# Altium PCB mainboardDory.PcbDoc (part 2 of 2)
Units mil, origin at the board's own origin, x right, y up, seen from the top; angles counter-clockwise.
Board outline 5000 x 2698.04 mil, 2 copper layers (Top Layer, Bottom Layer); 85 components, 78 nets, 393 pads, 169 vias.
Unrouted connection lines stored in the file: 5.
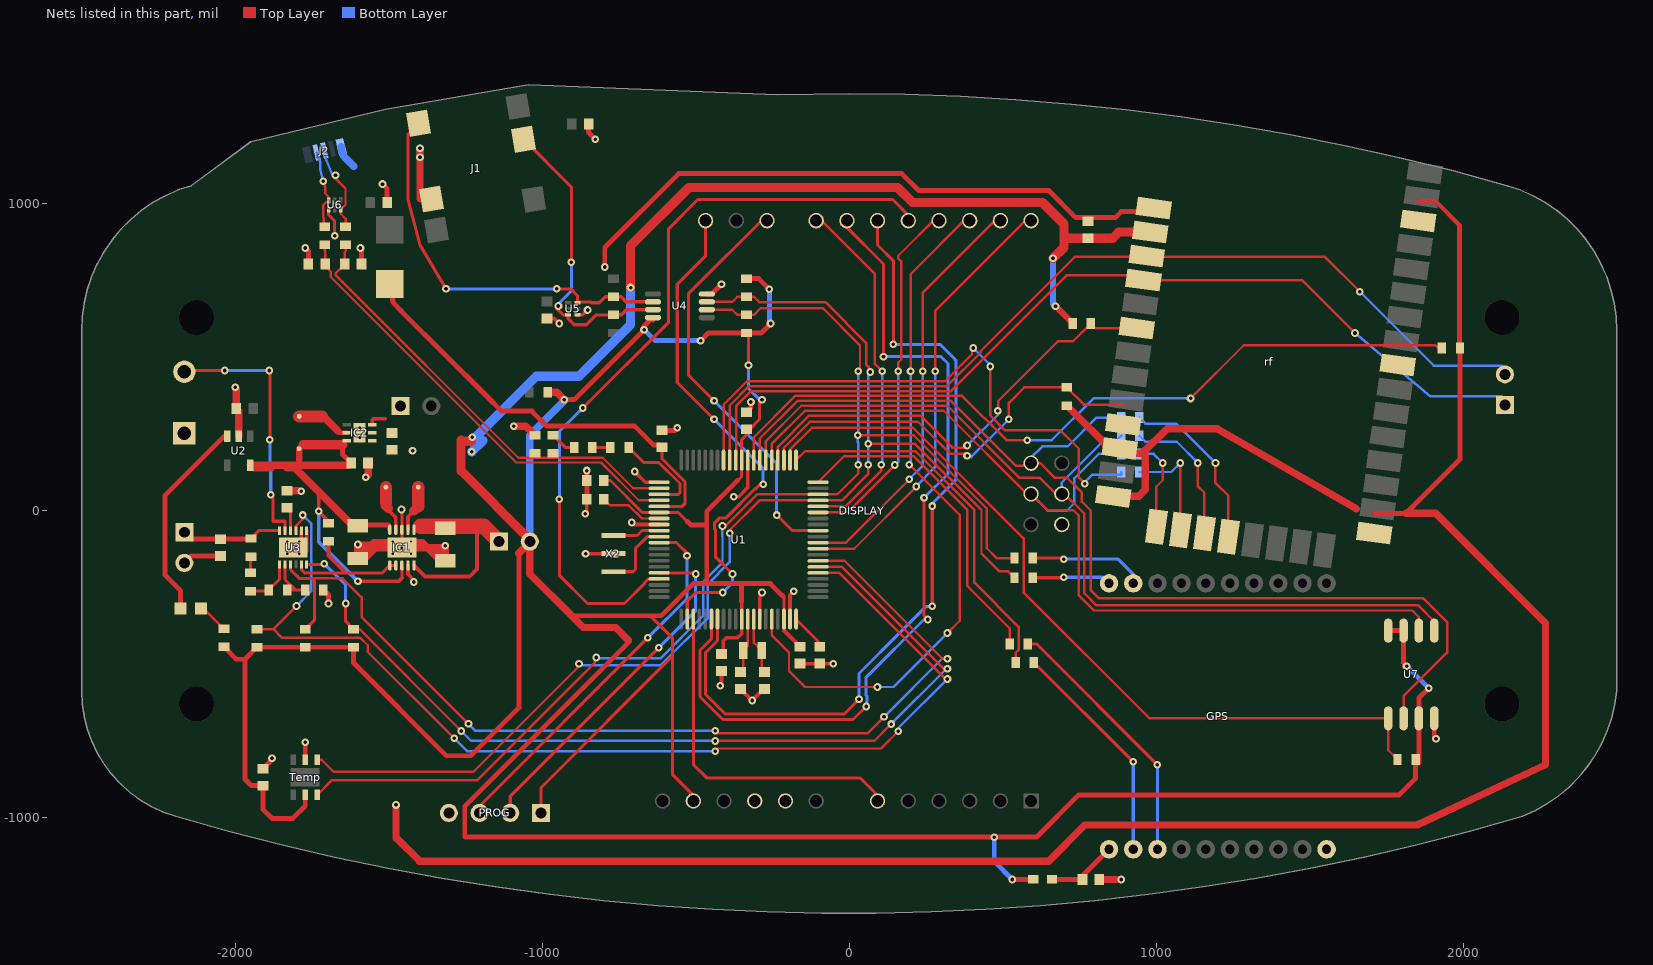
[diagram p2: the nets of this part, all layers, seen from the top]

## Via types
v1: diameter 25, hole 11.81, Top Layer to Bottom Layer, 150 vias
v2: diameter 19.68, hole 7.87, Top Layer to Bottom Layer, 15 vias
v3: diameter 35.43, hole 23.62, Top Layer to Bottom Layer, 3 vias
v4: diameter 27.56, hole 11.81, Top Layer to Bottom Layer, 1 vias

## Nets (pads, with @x,y where several pads share a name; then routed paths per layer and width w, separated by ;. In a path a pad name is that pad's centre, name@x,y a point inside that pad or via, vN(x,y) a via of type N, cw(c..) or ccw(c..) an arc to the next point about the centre after c; other vN are vias at no path point) (continued)
GND: BT1.2 C1.1 C2.1 C3.1 C4.1 C5.1 C6.1 C7.1 C8.1 C9.1 C10.1 C11.1 C12.1 C13.1 C14.1 C15.2 C16.2 C17.1 C18.1 C19.2 C20.1 C21.1 C22.1 C23.1 C24.2 DISPLAY.GND0 DISPLAY.GND1 DISPLAY.GND2 GPS.10 IC1.3 IC1.9 IC1.11 IC2.1 IC2.7 J1.2 J2.5 PROG.4 R6.1 R20.2 R26.1 R27.1 rf.1 rf.11 rf.13 rf.22 rf.35 S1.1 Temp.2 U1.14 U1.19 U1.49 U1.61 U1.68 U2.2 U3.1 U3.2 U3.13 U4.4 U5.4 U6.4 U7.4 X2.2 | length 13589.7
  Top Layer w10: U6.4@-1695.57,980.95 -1695.89,964.11 -1675.89,944.11 -1675.89,900.11 v1@-1671.89,896.11 ; v2(-1456.69,-119.8) -1456.69,-104.42 IC1.3@-1456.69,-61.72 -1456.69,-4.69 v1@-1456,-4
  Top Layer w12: U3.13@-1811.02,-119.8 v2(-1791.34,-100.11) U3.13@-1784.45,-93.22 ; U3.2@-1784.45,-64.68 U3.13@-1784.45,-93.22 ; U3.1@-1766.73,-64.68 -1766.73,-131.27 -1784.45,-113.55 U3.13@-1784.45,-93.22 ; v2(-1456.69,-119.8) IC1.11@-1437.01,-139.48 ; IC1.9@-1437.01,-177.87 -1437.01,-206.99 -1418,-226 v1(-1418,-232) ; C7.1@-984,626.44 -960.44,626.44 v1(-944,610) ; U5.4@-884.84,638.31 -867.69,638.31 v1(-852,654) ; v1(-860,-10) -854.33,-4.33 C15.2@-854.33,37.68 ; v1(-858.52,-139.48) X2.2@-767.72,-139.48 ; v1(-708,-38) -701.21,-44.79 U1.68@-618.86,-44.79 ; v1(-698.82,127.95) -663.87,93.01 U1.61@-618.86,93.01 ; v1(-420,-570) -416,-566 C21.1@-416,-521.56 ; v1(-376,46) -360,46 -330.47,75.53 U1.49@-330.47,164.86 ; C12.1@-354.33,-580.43 v1@-316.76,-618 ; v1(-316,-618) v1@-316.76,-618 ; U1.14@-291.1,-352.86 -291.1,-273.1 v1(-284,-266) ; C14.1@-275.59,-580.43 -279.18,-580.43 v1@-316.76,-618 ; U1.19@-192.68,-352.86 -192.68,-274.68 v1(-180,-262) ; C20.1@-160,-497.56 -159.56,-498 v1(-52,-498)
  Top Layer w14: 1853.26,1008.72 1909.28,1008.72 1988,930 ; U7.4@1905.71,-675.9 1905.71,-736.24 v1(1911.46,-742)
  Top Layer w16: BT1.2@-2165.35,-169.8 -2142.91,-147.35 C3.1@-2047.24,-147.35 ; C4.1@-1996.06,332.96 C4.1@-1988.19,325.09 ; C11.1@-1909.45,-840.27 -1880,-810.82 v1(-1880,-806) ; v1(-1772,-754) -1771.65,-754.35 Temp.2@-1771.65,-810.74 ; v1(-1771.89,856.11) -1761.43,845.65 C8.1@-1761.43,803.2 ; R6.1@-1712.6,-257.59 -1696,-274.19 v1(-1696,-302) ; v1(-1591.89,856.11) -1588.2,852.43 C9.1@-1588.2,803.2 ; v1(-1519.89,1064.11) -1505.02,1049.24 C10.1@-1505.02,1004.36 ; v1(-855,131) -854.33,130.33 C19.2@-854.33,98.43 C15.2@-854.33,37.68 ; C6.1@-848.43,1259.84 -848.43,1232.28 v1(-826.77,1210.63) ; v1(-796,794) -796,857.54 -555.54,1098 171.69,1098 226.38,1043.31 649.61,1043.31 738.19,954.72 866.14,954.72 885.83,974.41 935.04,974.41 rf.1@964.57,1003.94 ; C18.1@-610.24,262.09 -567.91,262.09 v1(-560,270) ; U4.4@-463.58,705.99 -448.01,705.99 v1(-416,738) ; C22.1@-334.65,321.15 -320.5,335.3 -320.5,354 v1(-320,354.5) ; 1710.33,-8.29 1813.71,-8.29 1989.53,167.53 R27.1@1989.53,530 1988,531.53 1988,930
  Top Layer w24: v1(-2000,402) -1996.06,398.06 C4.1@-1996.06,332.96 ; U2.2@-1988.19,242.41 C4.1@-1988.19,325.09 ; C5.1@-1830.71,65.24 v1@-1793.47,65.24 ; IC2.7@-1594.49,240.49 IC2.7@-1594.49,254.22 ; v1(-1575,109) -1566.93,117.07 C2.1@-1566.93,155.8 ; -1476,-1066 v1(-1476,-958) ; -1473.37,-1066 -1397.64,-1141.73 ; -1400.27,-1141.73 649.61,-1141.73 767.72,-1023.62 1850.39,-1023.62 2268,-826.77 2268,-366 1910.28,-8.29 1813.71,-8.29 ; v1(-1397.64,1181.1) v1(-1397.64,1151.57) -1397.64,1015.33 J1.2@-1360.72,1015.33 ; C23.1@-1312,-153.26 C23.1@-1316,-153.26 ; v1(-1092.52,275.59) -1053.15,275.59 R20.2@-1023.62,246.06 ; R26.1@708.66,342.8 864.46,187.01 954.72,187.01 ; C17.1@814.96,-1200.79 v1(885.83,-1200.79) ; rf.13@859.69,47 942.67,47 964.57,68.9 964.57,177.17 954.72,187.01 ; 1652,6 1198.27,267.73 1035.44,267.73 954.72,187.01 ; C24.2@-1600,-155.15 -1577.15,-155.15 -1541.8,-119.8 v2(-1456.69,-119.8) -1374.2,-119.8 ; C24.2@-1600,-155.15 v1(-1600,-110) v1@-1597.43,-112.57 ; C24.2@-1600,-155.15 -1575.43,-130.57 ; v1@-1597.43,-112.57 -1557.43,-112.57 ; v1@-1597.43,-112.57 -1579.43,-130.57 -1575.43,-130.57 ; -1575.43,-130.57 -1557.43,-112.57 ; -1557.43,-112.57 -1549.27,-104.42 -1456.69,-104.42 -1389.58,-104.42 -1374.2,-119.8 ; -1374.2,-119.8 -1340,-119.8 ; -1374.2,-119.8 -1340.74,-153.26 C23.1@-1325.89,-153.26 ; -1340,-119.8 -1340,-139.15 C23.1@-1325.89,-153.26 ; -1340,-119.8 -1321.8,-119.8 v1(-1316,-114) C23.1@-1316,-153.26 ; C23.1@-1325.89,-153.26 C23.1@-1316,-163.15 C23.1@-1316,-153.26 ; C23.1@-1325.89,-153.26 C23.1@-1316,-153.26
  Bottom Layer w12: v1@-380,50 v1(-376,46) ; v1@-316,-622 v1(-316,-618)
  Bottom Layer w24: J2.5@-1654.82,1186.15 ccw(c-1598.2,1186.15) -1638.24,1146.11 -1614.17,1122.05 ; v1(-1397.64,1151.57) v1(-1397.64,1181.1)
  other v1: -1458,4 -1785,64 -1422,196 -1675.89,896.11
  other v2: -1830.71,-139.48 -1791.34,-139.48 -1486.22,-139.48 -1427.17,-139.48 -1830.71,-100.11 -1486.22,-100.11 -1427.17,-100.11 -1594.49,238.47 -1594.49,269.97
LED0: DISPLAY.D0 U1.29 | length 1442.7
  Top Layer w8: U1.29@-101.14,-123.53 16.36,-123.53 v1(218.94,79.06) ; v1(280,454) 280,650.5 DISPLAY.D0@592.5,963
  Bottom Layer w8: v1(218.94,79.06) 218.94,81.18 280,142.24 v1(280,454)
LED1: DISPLAY.D1 U1.30 | length 1365.8
  Top Layer w8: U1.30@-101.14,-103.84 -10.63,-103.84 v1(195.61,102.39) ; v1(240,454) 240,710.5 DISPLAY.D1@492.5,963
  Bottom Layer w8: v1(195.61,102.39) 195.61,103.1 240,147.49 v1(240,454)
NetC1_2: C1.2 IC2.2 IC2.3 JP5V.1 | length 59.5
  Top Layer w12: IC2.3@-1553.15,279.81 -1553.15,296.85 -1550,300 -1512,300
NetC5_2: C5.2 U3.4 | length 79.3
  Top Layer w10: C5.2@-1830.71,10.13 -1819.88,-0.7 U3.4@-1819.88,-64.68
NetC12_2: C12.2 U1.12 X1.2 | length 182.3
  Top Layer w8: C12.2@-354.33,-525.31 -344.49,-515.46 X1.2@-344.49,-454.44 -330.47,-440.43 U1.12@-330.47,-352.86
NetC14_2: C14.2 U1.13 X1.1 | length 187
  Top Layer w8: U1.13@-310.79,-352.86 -310.79,-429.09 X1.1@-285.43,-454.44 -285.43,-515.46 C14.2@-275.59,-525.31
NetC15_1: C15.1 U1.67 | length 206.4
  Top Layer w8: C15.1@-799.21,37.68 -779.53,18 -718.35,18 -675.24,-25.1 U1.67@-618.86,-25.1
NetC16_1: C16.1 U1.20 | length 105.1
  Top Layer w10: U1.20@-172.99,-352.86 C16.1@-98.7,-427.15
NetC17_2: C17.2 GPS.1 L3.2 | length 233.7
  Top Layer w16: L3.2@660.43,-1200.79 C17.2@759.84,-1200.79 759.84,-1188.98 GPS.1@846.46,-1102.36
NetC23_2: C23.2 IC1.1 IC1.10 JP3V3.1 | length 646.8
  Top Layer w12: IC1.10@-1417.32,-177.87 -1381.19,-214 -1236,-214 -1212,-190 -1212,-50
  Top Layer w50: -1396,-50 -1212,-50 -1190.27,-50 JP3V3.1@-1140.16,-100.11
NetDS1_1: DS1.1 R3.2 | length 102.1
  Top Layer w8: DS1.1@-2110.54,-318 -2102.47,-318 R3.2@-2036,-384.47
NetDS1_2: DS1.2 U2.3 | length 671
  Top Layer w16: DS1.2@-2177.47,-318 -2177.47,-260.53 -2228,-210 -2228,50 -2035.59,242.41 U2.3@-2025.59,242.41
NetGPS_2: GPS.2 R12.1 | length 743.4
  Top Layer w10: R12.1@601.53,-494 v1(925.2,-817.67) ; GPS.2@925.2,-1103.31 GPS.2@925.2,-1102.36
  Bottom Layer w10: GPS.2@925.2,-1102.36 v1(925.2,-817.67)
NetGPS_3: GPS.3 R13.1 | length 865.5
  Top Layer w10: R13.1@581.53,-434 611.17,-434 v1(1003.94,-826.77) ; GPS.3@1003.94,-1107.2 GPS.3@1003.94,-1102.36
  Bottom Layer w10: GPS.3@1003.94,-1102.36 v1(1003.94,-826.77)
NetGPS_19: GPS.19 R14.2 | length 379
  Top Layer w10: R14.2@597.53,-154 695.34,-154 v1(698.82,-157.48)
  Bottom Layer w10: v1(698.82,-157.48) 875.98,-157.48 925.2,-206.69 GPS.19@925.2,-236.22
NetGPS_20: GPS.20 R11.2 | length 257.7
  Top Layer w10: R11.2@597.53,-218 697.35,-218 v1(698.82,-216.54)
  Bottom Layer w10: v1(698.82,-216.54) 826.77,-216.54 GPS.20@846.46,-236.22
NetIC1_2: IC1.2 L1.2 | length 152.6
  Top Layer w12: IC1.2@-1437.01,-61.72 -1437.01,-19.66 -1418,-0.65
  Top Layer w30: -1418,-0.65 -1403.69,13.66
  Top Layer w40: -1403.69,13.66 L1.2@-1403.69,77.05
NetIC1_4: IC1.4 L1.1 | length 152.7
  Top Layer w12: -1498,15 -1498,-0.69 -1476.38,-22.32 IC1.4@-1476.38,-61.72 IC1.4@-1476,-61.35
  Top Layer w30: -1511.69,17.69 -1501,7
  Top Layer w40: -1508.69,25.69 L1.1@-1508.69,77.05
NetIC2_5: IC2.5 L2.2 | length 177.5
  Top Layer w16: -1664.22,254.22 IC2.5@-1635.83,254.22
  Top Layer w24: -1720,315 -1667,262
  Top Layer w40: L2.2@-1791.34,307.22 -1717.22,307.22
NetPROG_2: PROG.2 U1.76 | length 1148.8
  Top Layer w10: PROG.2@-1103.94,-984.25 -1103.94,-929.94 v1(-620,-446) ; U1.76@-618.86,-202.27 -503.73,-202.27 v1(-500,-206)
  Bottom Layer w10: v1(-620,-446) -500,-326 v1(-500,-206)
NetPROG_3: PROG.3 U1.71 | length 1212.2
  Top Layer w10: PROG.3@-1203.94,-961.94 v1(-656,-414) ; U1.71@-618.86,-103.84 -562.16,-103.84 -524,-142 v1(-528,-146)
  Bottom Layer w10: v1(-656,-414) -528,-286 v1(-528,-146)
NetR2_1: R2.1 R4.2 | length 53.6
  Top Layer w10: R4.2@-1950,-202.47 -1950,-150.5 R2.1@-1948.82,-149.32
NetR4_1: R4.1 R5.2 U3.7 | length 158.8
  Top Layer w10: R4.1@-1950,-261.53 -1893.7,-261.53 R5.2@-1889.76,-257.59 -1855.32,-223.14 U3.7@-1855.32,-174.91
NetR5_1: R5.1 R6.2 U3.8 | length 155.5
  Top Layer w10: U3.8@-1837.6,-174.91 -1837.6,-224.4 -1804.41,-257.59 ; R5.1@-1830.71,-257.59 -1804.41,-257.59 ; R6.2@-1771.65,-257.59 -1804.41,-257.59
NetR21_2: R21.2 rf.14 | length 263.1
  Top Layer w8: rf.14@1000.34,-9.84 1000.34,78.33 1021.36,99.34 v1(1021.36,155.8)
  Bottom Layer w8: R21.2@944.88,185.32 991.83,185.32 v1(1021.36,155.8)
NetR22_2: R22.2 rf.15 | length 364.2
  Top Layer w8: rf.15@1078.57,-62.52 v1(1078.57,155.8)
  Bottom Layer w8: R22.2@944.88,126.27 1049.05,126.27 v1(1078.57,155.8)
NetR23_2: R23.2 rf.16 | length 480.7
  Top Layer w8: v1(1135.79,155.8) 1135.79,79.66 1156.8,58.64 rf.16@1156.8,-88.58
  Bottom Layer w8: R23.2@944.88,244.38 964.55,224.71 1066.87,224.71 v1(1135.79,155.8)
NetR24_2: R24.2 rf.17 | length 531.7
  Top Layer w8: v1(1193,155.8) 1193,90.84 1235.03,48.8 rf.17@1235.03,-49.21
  Bottom Layer w8: R24.2@944.88,303.43 964.55,283.77 1065.03,283.77 v1(1193,155.8)
NetR110_1: R110.1 U1.63 | length 315.7
  Top Layer w10: R110.1@-718.5,206.69 -669.29,157.48 -620.08,157.48 -551.18,88.58 -551.18,59.06 -556.6,53.64 U1.63@-618.86,53.64
NetR110_2: R110.2 R111.1 | length 59.1
  Top Layer w10: R111.1@-836.61,206.69 R110.2@-777.56,206.69
NetR111_2: R111.2 R112.1 | length 85.2
  Top Layer w10: R112.1@-964.57,246.06 -925.2,206.69 R111.2@-895.67,206.69
POWER_ENABLE: IC1.6 IC1.7 R15.1 U3.11 | length 463
  Top Layer w10: U3.11@-1784.45,-174.91 -1784.45,-191.45 -1773.9,-202 -1644,-202 -1520.2,-202 IC1.6@-1496.06,-177.87 IC1.7@-1476.38,-177.87
  Top Layer w12: R15.1@-1696,-99.53 -1696,-146 -1644,-198 -1644,-202
POWER_INTERRUPT: R28.1 U1.26 U3.12 | length 3052.2
  Top Layer w8: R28.1@-1614.17,-385.54 -1595.13,-385.54 v1(-1263.33,-717.33) ; v1(-436,-749.69) 81.65,-749.69 v1(136.67,-694.67) ; U1.26@-101.14,-182.58 -23.58,-182.58 308.84,-515 v1(320,-515)
  Top Layer w10: U3.12@-1766.73,-174.91 -1712.91,-174.91 v1(-1710,-172) ; v1(-1640,-302) -1640,-359.72 R28.1@-1614.17,-385.54
  Bottom Layer w8: v1(-1263.33,-717.33) -1230.98,-749.69 v1(-436,-749.69) ; v1(136.67,-694.67) 316.33,-515 v1(320,-515)
  Bottom Layer w10: v1(-1710,-172) -1640,-242 v1(-1640,-302)
POWER_KILL: R29.1 U1.25 U3.3 | length 3587.7
  Top Layer w8: R29.1@-1929.13,-385.54 -1875.54,-385.54 ; U3.3@-1802.17,-64.68 -1802.17,-49.55 -1780,-27.39 v1(-1780,-14) ; v1(-1800,-310) -1875.54,-385.54 ; v1(-1286.67,-740.67) -1568,-459.34 -1568,-438 -1592,-414 -1847.09,-414 -1875.54,-385.54 ; v1(-436,-782.69) -427.5,-774.19 103.81,-774.19 108.63,-769.37 v1(160,-718) ; U1.25@-101.14,-202.27 -31.73,-202.27 314,-548 v1(320,-548)
  Bottom Layer w8: v1(-1800,-310) -1752,-262 -1752,-42 v1(-1780,-14) ; v1(-1286.67,-740.67) -1244.65,-782.69 v1(-436,-782.69) ; v1(160,-718) 160,-708 v1(320,-548)
POWER_WARNING: R19.1 U1.27 U3.9 | length 3247.6
  Top Layer w8: -1760,-220 -1750.19,-220 -1651.46,-220 -1650,-220 -1588,-282 -1588,-346 v1(-1240,-694) ; v1(-436,-716.69) -427.5,-725.19 59.48,-725.19 v1(113.33,-671.33) ; U1.27@-101.14,-162.9 -15.42,-162.9 303.68,-482 v1(320,-482)
  Top Layer w10: -1819.88,-191.45 U3.9@-1819.88,-174.91 ; -1818.09,-193.25 -1791.34,-220 -1760,-220 ; R19.1@-1771.65,-385.54 -1742.13,-356.02 -1742.13,-228.06 -1750.19,-220
  Bottom Layer w8: v1(-1240,-694) -1217.32,-716.69 v1(-436,-716.69) ; v1(113.33,-671.33) 302.66,-482 v1(320,-482)
POWERBTN: S1.2 U3.5 | length 844.2
  Top Layer w10: S1.2@-2165.35,452.65 -2161,457 v1(-2034,457) ; v1(-1889,457) -1887,455 v1(-1887,231) ; v1(-1884,52.03) -1876.97,45 -1876.97,-34.17 -1837.6,-34.17 U3.5@-1837.6,-64.68
  Bottom Layer w10: v1(-2034,457) v1(-1889,457) ; v1(-1887,231) -1887,133 -1884,130 v1(-1884,52.03)
RX_FROM_GPS: R12.2 U1.41 | length 1231.4
  Top Layer w8: U1.41@-172.99,164.86 -143.85,194 79.85,194 100.15,194 ; 101.15,194 216.4,194 408,2.4 408,-234 552,-378 552,-452.94 542.47,-462.47 R12.2@542.47,-494
RX_FROM_ZIGBEE: rf.3 RX/TX.2 U1.52 | length 3043.1
  Top Layer w8: U1.52@-389.53,164.86 -389.53,342.25 -325.78,406 318.63,406 428.5,515.87 428.5,520.44 734.83,826.77 1549.86,826.77 v1(1663.32,713.32)
  Bottom Layer w8: v1(1663.32,713.32) 1904.3,472.33 2125.98,472.33
SCL: R7.1 R14.1 Temp.6 U1.38 U4.2 | length 4045.6
  Top Layer w8: Temp.6@-1732.28,-924.91 -1685.65,-878.28 -1212.28,-878.28 -828,-494 v1@-828,-489.7 ; U4.2@-463.58,654.81 -380.92,654.81 -364.19,638.08 R7.1@-334.65,638.08 -310.27,638.08 -288.74,659.61 -85.61,659.61 35.23,538.77 v1@35.23,458.77 ; v1(-412.63,-49.37) -403.21,-49.37 -300.2,53.64 U1.38@-101.14,53.64 -38.86,53.64 29.5,122 v1(29.5,150) ; v1(28,246) 209.66,246 448,7.66 448,-122 480,-154 R14.1@538.47,-154
  Bottom Layer w8: v1@-815,-481 -615,-481 -476,-342 -476,-231.37 -412.63,-168 -412.63,-84.02 -413.79,-82.86 -413.79,-50.54 v1(-412.63,-49.37) ; v1@27.23,245.23 27.23,224.27 29.5,222 v1(29.5,150) ; v1@29.5,246 v1(29.5,454)
  other v1: -824,-478
SCL5V: J1.3 R8.1 U4.7 U5.3 | length 1010
  Top Layer w10: J1.3@-1060.35,1210.11 -905,1054.76 v1(-905,810) v1@-912,817 ; v1(-947,667) -954,660 -932.32,638.31 U5.3@-915.16,638.31 -915.16,625.37 -895.79,606 -856,606 -823.92,638.08 R8.1@-767.72,638.08
  Top Layer w12: R8.1@-767.72,638.08 -742.27,638.08 -725.54,654.81 U4.7@-638.78,654.81
  Bottom Layer w10: v1(-947,667) -947,674 -905,716 v1(-905,810)
SCREEN_BORDER: DISPLAY.D3 U1.35 | length 1196.6
  Top Layer w8: U1.35@-101.14,-5.42 -5.54,-5.42 v1(148.94,149.06) ; v1(160,454) 160,482.35 169.5,491.85 169.5,812.54 160,822.04 160,830.5 DISPLAY.D3@292.5,963
  Bottom Layer w8: v1(148.94,149.06) 151.06,149.06 160,158 v1(160,454)
SCREEN_BUSY: DISPLAY.D7 U1.36 | length 1177
  Top Layer w8: DISPLAY.D7@-107.5,963 84,771.5 84,478 v1(108,454) ; U1.36@-101.14,14.27 -11.73,14.27 104,130 v1(104,150)
  Bottom Layer w8: v1(104,150) 108,154 v1(108,454)
SCREEN_DISCHARGE: DISPLAY.D8 U1.32 | length 1358.3
  Top Layer w10: v1(-440,358) -524,442 -524,706.5 DISPLAY.D8@-267.5,963 ; v1(-236,-14) -185.53,-64.47 U1.32@-101.14,-64.47
  Bottom Layer w10: v1(-440,358) -236,154 v1(-236,-14)
SCREEN_PANEL_ON: DISPLAY.D2 U1.16 | length 2325.2
  Top Layer w8: U1.16@-251.73,-352.86 -251.73,-406.27 -196,-462 -196,-522 -144,-574 v1(92,-574) ; v1(196,150) 360,-14 360,-358 v1(320,-398) ; v1(200,454) 200,770.5 DISPLAY.D2@392.5,963
  Bottom Layer w8: v1(92,-574) 144,-574 v1(320,-398) ; v1@200,152.75 v1(200,454)
SCREEN_PWM: DISPLAY.D5 U1.7 | length 2721.9
  Top Layer w10: U1.7@-428.9,-352.86 -428.9,-422.9 -468,-462 -468,-598 -404,-662 -16,-662 v1(32,-614) ; DISPLAY.D5@92.5,963 92.5,865.5 145,813 145,541 v1(144,542) ; v1(270.63,-311.37) v1(270.63,15.37)
  Bottom Layer w10: v1(32,-614) 32,-530 167.87,-394.13 167.87,-394.07 209.94,-352 ; v1(144,542) 296,542 340,498 347.61,490.38 347.61,100.85 340,93.23 270.63,23.86 v1(270.63,15.37) ; 212,-350 250.63,-311.37 v1(270.63,-311.37)
SCREEN_RST_LOW: DISPLAY.D6 U1.6 | length 2833.4
  Top Layer w10: U1.6@-448.58,-352.86 -448.58,-417.13 -486,-454.54 -486,-605.46 -411.46,-680 12.67,-680 v1(55.33,-637.33) ; DISPLAY.D6@-7.5,963 -7.5,923.07 112,803.57 v1(112,502) ; v1(244,42) 244,-342 v1(256,-354)
  Bottom Layer w10: v1(55.33,-637.33) 57.5,-635.17 57.5,-603.44 55.33,-601.27 55.33,-542.67 244,-354 v1(256,-354) ; v1(112,502) 299.23,502 321.61,479.62 321.61,119.62 v1(244,42)
SCREEN_TEMP: DISPLAY.A0 U1.3 | length 1115.3
  Top Layer w10: U1.3@-507.64,-352.86 -507.64,-826.36 -464,-870 35.5,-870 DISPLAY.A0@92.5,-927
SDA: R9.1 R11.1 Temp.1 U1.37 U4.3 | length 4088.6
  Top Layer w8: Temp.1@-1732.28,-810.74 -1718.27,-810.74 -1679.01,-850 -1224,-850 v1@-882,-508 ; U4.3@-463.58,680.4 -380.92,680.4 -364.19,697.13 R9.1@-334.65,697.13 -310.27,697.13 -292.74,679.61 -77.32,679.61 55.23,547.05 55.23,476.77 63.23,468.77 v1@63.23,458.77 ; v1(-389.29,-72.71) -389.29,-63.29 -292.05,33.95 U1.37@-101.14,33.95 -23.9,33.95 61.73,119.58 v1@61.73,149.23 ; v1(62.5,218) 215.03,218 431.03,2 431.03,-138.97 489.32,-197.26 517.73,-197.26 R11.1@538.47,-218
  Bottom Layer w8: v1(-880,-498) -875.5,-502.5 -613.87,-502.5 -460,-348.63 -460,-238 -389.29,-167.29 v1(-389.29,-72.71) ; v1@61.73,453.23 61.73,217.23 v1(62.5,218) v1(62.5,150)
  other v1: 69,452
SDA5V: J1.4 R10.1 U4.6 U5.6 | length 1304.4
  Top Layer w10: J1.4@-1402.58,1261.8 -1437.01,1227.37 -1437.01,1013.78 -1397.64,866.14 v1(-1313,723) ; v1(-952,723) -907,723 -884.84,700.84 U5.6@-884.84,677.68 -883.03,679.5 -841.44,679.5 -839.62,677.68 -813.72,677.68 -794.27,697.13 R10.1@-767.72,697.13
  Top Layer w12: R10.1@-767.72,697.13 -742.27,697.13 -725.54,680.4 U4.6@-638.78,680.4
  Bottom Layer w10: v1(-1313,723) v1(-952,723)
SPI_EPD_CS: DISPLAY.D10 U1.2 | length 1686.4
  Top Layer w10: U1.2@-527.32,-352.86 -527.32,-293.32 -500,-266 v1(-412,-266) ; DISPLAY.D10@-467.5,963 -467.5,830.5 -560,738 -560,418 v1(-440,298) ; v1(-380,-206) -436,-150 -436,-62.06 -438.13,-59.94 -438.13,-38.81 -423.19,-23.87 -402.06,-23.87 -401.97,-23.97 -304,74 -304,71.64 v1@-286.27,89.37
  Bottom Layer w10: v1(-440,298) -280,138 v1@-280,90 ; v1(-412,-266) -380,-234 v1(-380,-206)
  other v1: -280,86
SPI_FLASH_CS: R25.1 U1.42 U7.1 | length 2654.1
  Top Layer w8: U1.42@-192.68,164.86 -190.9,166.64 -190.9,200.82 -121.22,270.5 207.78,270.5 568,-89.72 568,-266 977.9,-675.9 U7.1@1755.71,-675.9 1755.71,-779.77 R25.1@1785.94,-810
SPI_MISO: DISPLAY.MISO R24.1 U1.47 U7.2 | length 3561.4
  Top Layer w8: U1.47@-291.1,164.86 -291.1,234.9 -168,358 331.68,358 543.68,146 565.5,146 DISPLAY.MISO@592.5,173 ; DISPLAY.MISO@592.5,155 622.56,155 669.29,108.27 708.66,108.27 757.87,59.06 757.87,29.53 787.4,0 787.4,-259.28 813.55,-285.43 1870.08,-285.43 1947.46,-362.82 1947.46,-462 1805.71,-603.76 U7.2@1805.71,-675.9
  Bottom Layer w8: DISPLAY.MISO@592.5,173 629.5,210 711.97,210 805.4,303.43 R24.1@885.83,303.43
SPI_MOSI: DISPLAY.MOSI R23.1 U1.46 U7.5 | length 3053.1
  Top Layer w8: U1.46@-271.42,164.86 -271.42,226.74 -156.16,342 319.84,342 553.57,108.27 620.08,108.27 673.35,55 DISPLAY.MOSI@692.5,55 701.5,55 765.55,-9.05 765.55,-268.33 804.5,-307.29 1852.56,-307.29 1905.71,-360.43 U7.5@1905.71,-390.46
  Bottom Layer w8: DISPLAY.MOSI@692.5,55 692.5,92.11 825.07,224.67 866.12,224.67 R23.1@885.83,244.38
SPI_SCK: DISPLAY.SCK R21.1 U1.45 U7.6 | length 3116.4
  Top Layer w8: U1.45@-251.73,164.86 -251.73,218.59 -144.32,326 308,326 DISPLAY.SCK@585.75,48.25 ; DISPLAY.SCK@592.5,55 645.81,1.69 730.04,1.69 748.03,-16.31 748.03,-275.59 797.24,-324.8 1833.88,-324.8 1855.71,-346.63 U7.6@1855.71,-390.46
  Bottom Layer w8: DISPLAY.SCK@592.5,55 647.5,0 708.66,0 733.27,24.61 733.27,105.64 812.95,185.32 R21.1@885.83,185.32
SPI_SD_CS: DISPLAY.D4 U1.77 | length 2515.6
  Top Layer w10: v1(-944,38) -944,-210 -852,-302 -732,-302 -666.31,-236.31 -666.31,-233.81 -655.23,-222.73 -619.64,-222.73 U1.77@-618.86,-221.95 ; v1(-867.35,334.65) -588,614 -588,918.56 -492.78,1013.78 141.72,1013.78 DISPLAY.D4@192.5,963
  Bottom Layer w10: v1(-944,38) -944,258 -877.2,324.8 -875.98,324.8 -867.35,333.43 v1(-867.35,334.65)
SPI_XBEE_CS: R22.1 U1.53 | length 1910.4
  Top Layer w8: U1.53@-409.21,164.86 -409.21,345.19 -332.4,422 312,422 400,510 400,526 v1(404,530) ; v1(460,470) 459.5,469.5 459.5,310.5 508,262 688,262 748.03,201.97 748.03,108.27 v1(767.72,88.58)
  Bottom Layer w8: v1(404,530) 460,474 v1(460,470) ; v1@770.18,95.96 792.32,118.11 885.83,118.11 R22.1@885.83,126.27
TX_TO_GPS: R13.2 U1.40 | length 1086.6
  Top Layer w8: U1.40@-101.14,93.01 -16.15,178 73.22,178 106.78,178 ; 107.78,178 209.77,178 384,3.77 384,-243.94 391.03,-250.97 522.47,-382.41 R13.2@522.47,-434
TX_TO_ZIGBEE: rf.4 RX/TX.1 U1.51 | length 2967.1
  Top Layer w8: U1.51@-368,182 -368,341.15 -319.15,390 -316,390 332,390 709.72,767.72 748.03,767.72 rf.4@949.32,767.72 ; rf.4@958.64,751.09 1475.54,751.09 1478.6,748.03 v1(1647.37,579.26)
  Bottom Layer w8: v1(1647.37,579.26) 1893.67,372.33 RX/TX.1@2125.98,372.33
USB_N: J2.2 R17.1 U6.3 | length 258.6
  Top Layer w7.5: v1(-1712.6,1072.83) -1706.6,1053.05 -1706.6,1033.56 -1695.57,1022.54 U6.3@-1695.57,1011.27 -1704.49,1002.35 -1706.35,1002.35 -1713.23,995.47 -1713.23,966.44 -1712.73,965.94 -1712.73,954.34 -1711.23,952.84 -1711.23,936.06 R17.1@-1706.31,931.15
  Bottom Layer w7.5: J2.2@-1734.23,1166.94 -1733.01,1165.72 -1733.01,1152.3 -1725.05,1144.34 -1725.05,1140.78 -1722.44,1138.17 -1722.44,1112.2 v1(-1712.6,1072.83)
USB_P: J2.3 R16.1 U6.6 | length 277.9
  Top Layer w7.5: v1@-1683.07,1092.52 -1678.14,1087.6 -1665.04,1074.54 -1640.55,1050.05 -1640.55,996.61 U6.6@-1656.2,980.95 -1656.2,967.48 -1640.2,951.48 -1639.39,951.48 R16.1@-1639.39,931.15
  Bottom Layer w7.5: J2.3@-1709.35,1172.96 -1702.76,1141.73 v1@-1683.07,1092.52
  other v1: -1673.23,1092.52
USBD_N: C8.2 R17.2 U1.64 | length 1484
  Top Layer w7.5: R17.2@-1707.89,866.58 -1707.89,846.04 -1706.32,844.47 C8.2@-1706.32,803.2 -1706.32,797.59 -1688.23,779.5 -1688.23,761.5 -1084.21,157.48 -808.61,157.48 -685.09,33.95 U1.64@-618.86,33.95
USBD_P: C9.2 R16.2 R20.1 R112.2 U1.62 | length 1454.7
  Top Layer w7.5: R16.2@-1639.89,866.58 -1639.89,846.04 -1643.32,842.61 C9.2@-1643.32,803.2 -1673.23,773.29 -1673.23,767.72 -1077.99,172.48 -964.57,172.48 -802.4,172.48 -703.24,73.32 U1.62@-618.86,73.32
V_SYS: BT1.1 C2.2 C3.2 C24.1 IC1.5 IC1.8 IC2.6 L2.1 R2.2 R15.2 U2.5 U3.6 | length 2032
  Top Layer w10: R2.2@-1948.82,-90.27 -1923.23,-64.68 U3.6@-1855.32,-64.68 ; -1456.69,-218.69 IC1.8@-1456.69,-177.87
  Top Layer w12: U2.5@-1950.79,147.92 -1938.98,136.11 ; -1729.41,48.59 -1728,47.18 v1(-1728,-2) -1696,-34 R15.2@-1696,-40.47 ; v1(-1600,-230) -1468,-230 -1456.69,-218.69 ; IC1.5@-1500,-46.96 -1500,-61.72 IC1.5@-1496.06,-61.72
  Top Layer w16: BT1.1@-2165.35,-66.65 BT1.1@-2165.35,-69.8 -2142.91,-92.24 C3.2@-2047.24,-92.24 R2.2@-1960.63,-92.24 ; -1938.98,136.11 -1881.17,136.11 -1873.78,143.5 -1840.22,143.5 -1832.83,136.11 -1816.93,136.11 ; L2.1@-1791.34,202.22 -1778.71,214.85 ; -1649.61,214.85 -1649.61,183.35 C2.2@-1622.05,155.8 C2.2@-1629.92,147.92 ; C24.1@-1619.04,-46.96 IC1.5@-1500,-46.96
  Top Layer w20: -1791.34,165.66 L2.1@-1791.34,202.22
  Top Layer w24: U2.5@-1950.79,147.92 C2.2@-1629.92,147.92 ; -1809.52,143.52 C24.1@-1619.04,-46.96
  Top Layer w30: -1778.71,214.85 -1649.61,214.85
  Bottom Layer w12: v1(-1728,-2) -1728,-102 v1(-1600,-230)
VBUS: C18.2 D1.2 U1.65 | length 1433.7
  Top Layer w10: U1.65@-618.86,14.27 -544.08,14.27 -535.18,23.17 -535.18,95.21 -610.24,170.27 C18.2@-610.24,206.98
  Top Layer w16: D1.2@-1496.06,738.19 -1486.22,679.13 -1456.69,647.92 -1181.1,374.02 -1131.89,324.8 -1033.46,324.8 -984.25,275.59 -698.82,275.59 -638.08,214.85 -618.11,214.85 C18.2@-610.24,206.98
VCC: C11.2 C13.2 C19.1 C20.2 C21.2 C22.2 DISPLAY.3V3 JP3V3.2 L3.1 PROG.1 R1.1 R3.1 R7.2 R9.2 R18.1 R19.2 R25.2 R28.2 R29.2 rf.2 Temp.5 U1.11 U1.18 U1.50 U1.66 U4.8 U7.3 U7.7 U7.8 | length 17062.7
  Top Layer w10: PROG.1@-1003.94,-984.25 -1003.94,-901.94 -576,-474 ; C19.1@-799.21,98.43 -777.56,98.43 -673.72,-5.42 U1.66@-618.86,-5.42 -556.58,-5.42 -528,-34 ; -648,-342 -576,-414 -576,-474 ; DISPLAY.3V3@-507.5,-927 -576,-858.5 -576,-474 ; -364,98 -350.16,111.84 U1.50@-350.16,164.86 -350.16,231.84 -334.65,247.35 C22.2@-334.65,266.03 -323.97,266.03 -292,298 -292,362 v1(-284,362) ; R7.2@-334.65,579.02 -328,572.38 v1(-328,474) ; -216,-278 -212.36,-281.64 U1.18@-212.36,-352.86 -212.36,-389.87
  Top Layer w12: -652,618 -640.78,629.22 U4.8@-638.78,629.22 -638.78,619.22 ; C21.2@-412,-474 -409.9,-471.9 -409.9,-423.39 -400.5,-414 -365.19,-414 -364.07,-412.88 -362.88,-412.88 -350.16,-400.16 U1.11@-350.16,-352.86 -350.16,-295.84 ; -212.36,-389.87 -160,-442.23 C20.2@-160,-446.57
  Top Layer w16: R3.1@-2036,-443.53 -1996.06,-483.46 -1968,-483.46 ; Temp.5@-1771.65,-924.91 -1771.65,-961.65 -1812,-1002 -1880,-1002 -1909.45,-972.55 C11.2@-1909.45,-895.39 -1946.61,-895.39 -1968,-874 -1968,-483.46 ; -1076,-138 -1076,-642 -1232,-798 -1312,-798 -1614.17,-495.83 R28.2@-1614.17,-444.6 R19.2@-1771.65,-444.6 R29.2@-1929.13,-444.6 -1968,-483.46 ; v1(-928,362) -896,362 v1(-668,590) -668,602 -652,618 ; -904,-342 -648,-342 -612,-342 -507.5,-237.5 -256.5,-237.5 -216,-278 ; -716,-426 -1252,-962 -1252,-1062.99 v1(472.44,-1062.99) 610.24,-1062.99 748.03,-925.2 1791.34,-925.2 1844.99,-871.54 R25.2@1844.99,-810 ; -528,-34 -516,-46 -464,-46 ; v1(-484,554) -458.98,579.02 R7.2@-334.65,579.02 -286.98,579.02 v1(-256,610) ; -464,-238 -464,-46 ; -364,98 -464,-2 -464,-46 ; -350.16,-295.84 -350.16,-239.84 ; R9.2@-334.65,756.19 -294.19,756.19 v1(-260,722) ; v1(531.5,-1200.79) L3.1@599.41,-1200.79 ; U7.8@1755.71,-390.46 U7.7@1805.71,-390.46 1805.71,-496.24 v1(1815.46,-506) ; R25.2@1855.71,-821.76 U7.3@1855.71,-675.9 1855.71,-609.76 v1(1887.46,-578)
  Top Layer w20: v1(672,666) 672.58,666 R18.1@728.35,610.24
  Top Layer w24: -1076,-138 JP3V3.2@-1040.16,-102.16 ; JP3V3.2@-1040.16,-100.11 JP3V3.2@-1040.16,-102.16 ; R1.1@-982.47,386 -952,386 v1(-928,362) ; -719.13,-421.13 -760.27,-380 -866,-380 -904,-342 -1040.16,-205.84 JP3V3.2@-1040.16,-102.16
  Top Layer w30: -1230.32,226.38 -1260.38,226.38 -1264,230 -1264,130 -1040.16,-93.84 JP3V3.2@-1040.16,-100.11 ; v1(-712,727) -712,862.8 -521.65,1053.15 157.48,1053.15 206.69,1003.94 629.92,1003.94 699.76,934.09 699.76,885.83 ; v1(664,822) 699.76,857.76 699.76,885.83 ; rf.2@980.63,907.55 878.02,907.55 858.27,887.8 C13.2@777.56,887.8 701.73,887.8 699.76,885.83
  Bottom Layer w10: v1(-328,474) -328,398 -310,380 -309.44,380 -291.44,362 v1(-284,362)
  Bottom Layer w16: v1(-668,590) -632,554 v1(-484,554) ; v1(-260,722) -260,614 v1(-256,610) ; v1(472.44,-1062.99) 472.44,-1141.73 v1(531.5,-1200.79) ; v1(1815.46,-506) v1(1887.46,-578)
  Bottom Layer w20: v1(664,822) 664,674 v1(672,666)
  Bottom Layer w24: JP3V3.2@-1040.16,-100.11 -1040.16,245.84 -928,358 v1(-928,362)
  Bottom Layer w30: v1(-1229,192) -1192.47,228.53 ; -1223.47,219.53 -1230.32,226.38 -1018.69,438 -880,438 -712,606 v1(-712,727)
  other v1: -1228,239
XT2IN: U1.69 X2.1 | length 155.5
  Top Layer w10: X2.1@-767.72,-80.43 -690.43,-80.43 -674.47,-64.47 U1.69@-618.86,-64.47
XT2OUT: U1.70 X2.3 | length 236.1
  Top Layer w10: X2.3@-767.72,-198.54 -704.54,-198.54 -696,-190 -696,-122 -658.16,-84.16 U1.70@-618.86,-84.16
ZIGBEE_RST: R18.2 rf.6 U1.44 | length 1494.6
  Top Layer w8: U1.44@-232.05,164.86 -232.05,208.31 -130.36,310 232.28,310 336.28,206 377.5,206 v1(384,212.5) ; v1(484,326) 485.5,327.5 485.5,357.55 679.98,552.02 729.19,552.02 R18.2@787.4,610.24 803.01,594.62 rf.6@936.65,594.62
  Bottom Layer w8: v1(384,212.5) v1@492,320.5
ZIGBEE_RTS: R27.2 rf.29 U1.48 | length 2566.5
  Top Layer w8: U1.48@-310.79,164.86 -310.79,239.21 -176,374 368,374 512,230 v1(580,230) ; v1(1112,366) 1285.33,539.33 1787.29,539.33 1909.77,539.33 R27.2@1929.55,519.55
  Bottom Layer w8: v1(580,230) 660,230 796,366 v1(1112,366)
ZIGBEE_SLEEP: R26.2 rf.10 U1.43 | length 1361.7
  Top Layer w8: U1.43@-212.36,164.86 -212.36,205.37 -127.73,290 224,290 328,186 377.5,186 v1(384,179.5) ; v1(520,298) 520,351.5 570.36,401.86 R26.2@708.66,401.86 764.56,345.96 892.67,345.96
  Bottom Layer w8: 397.07,175.07 v1(520,298)
pads on no net: DISPLAY.5V DISPLAY.A5 DISPLAY.D9 DISPLAY.NC0 DISPLAY.NC1 DISPLAY.RST DISPLAY.VIN GPS.4 GPS.5 GPS.6 GPS.7 GPS.8 GPS.9 GPS.11 GPS.12 GPS.13 GPS.14 GPS.15 GPS.16 GPS.17 GPS.18 J1.6 J2.4 rf.5 rf.7 rf.8 rf.9 rf.12 rf.18 rf.19 rf.20 rf.21 rf.23 rf.24 rf.25 rf.26 rf.27 rf.28 rf.30 rf.31 rf.32 rf.33 rf.34 rf.36 rf.37 Temp.3 Temp.4 Temp.7 U1.1 U1.4 U1.5 U1.8 U1.9 U1.10 U1.15 U1.17 U1.31 U1.33 U1.34 U1.39 U1.54 U1.55 U1.56 U1.57 U1.58 U1.59 U1.60 U1.72 U1.73 U1.74 U1.75 U1.78 U1.79 U1.80 U2.4 U3.10 U4.1 U5.2 U5.5 U6.2 U6.5
copper on no net:
  other v2: -1791.34,-887.51 -1751.97,-887.51 -1791.34,-848.14 -1751.97,-848.14

## Polygon pours and split planes (outlines as drawn)
V_SYS on Top Layer "VSYS3v3" (solid, pour order 24): -1568,-71 -1561,-78 -1500,-78 -1500,-52 -1491,-43 -1507,-27 -1660,-27 -1660,-68 -1656,-72
V_SYS on Top Layer "vsys5v" (solid, pour order 27): -1607,139 -1607,174 -1607,191 -1623,207 -1623,234 -1853,234 -1855,232 -1862,225 -1862,129 -1620,129
NetC1_2 on Top Layer "vsys5v" (solid, pour order 23): -1567,248 -1566,249 -1540,249
GND on Top Layer "gnd5V" (solid, pour order 25): -1583,159 -1501,159 -1482,174.31 -1472,182.36 -1424,182.36 -1391,182.36 -1371,198.47 -1371,220.22 -1378,225.86 -1382,229.08 -1436,229.08 -1460,229.08 -1473,218.61 -1475,220.22 -1507,220.22 -1520,220.22 -1541,237.14 -1568,237.14 -1569,237.14 -1580,246 -1598,231.5 -1605,231.5 -1610,231.5 -1614,228.28 -1593,211.36 -1593,200.08 -1593,195.25 -1583,187.19
NetC1_2 on Top Layer "5Voutpoly" (solid, pour order 26): -1564,248 -1528,248 -1519,239 -1466,239 -1457,248 -1435,248 -1426,257 -1426,372 -1445,391 -1489,391 -1512,368 -1513,367 -1513,291 -1513,288 -1540,261 -1565,261
V_SYS on Top Layer "vsysBATT" (solid, remove dead copper, pour order 28): -2194,-104 -1499,-104 -1465,-70 -1607,72 -1607,174 -1665.77,174 -1725.77,234 -1757.77,202 -1995,202 -1995,169 -2199,-35
VCC on Top Layer "3v3poly" (solid, remove dead copper, pour order 29): -1188.11,61.91 -1091.76,-37.58 -1091.76,-466 -607.07,-466 -378,-229.46 -453.7,-151.28 -509.74,-151.28 -509.74,-157.38 -659.18,-311.69 -843.03,-311.69 -980.67,-169.56 -982.63,-167.53 -982.63,48.71 -1030.81,48.71 -1243.16,268 -1311,197.95 -1311,179.68
GND on Bottom Layer "Bottom_GND" (solid, remove dead copper, pour order 30): -2142.54,1059.37 -2185.64,1044.92 -2227.22,1026.56 -2266.94,1004.44 -2304.44,978.75 -2339.41,949.72 -2371.55,917.57 -2400.59,882.6 -2426.28,845.1 -2448.4,805.39 -2466.77,763.8 -2481.21,720.7 -2491.62,676.45 -2497.9,631.43 -2500,586.02 -2500,-586.02 -2497.92,-628.14 -2491.69,-669.85 -2481.37,-710.74 -2467.07,-750.41 -2448.93,-788.47 -2427.11,-824.56 -2401.84,-858.32 -2373.36,-889.42 -2341.96,-917.56 -2307.93,-942.46 -2271.6,-963.88 -2233.34,-981.61 -2193.52,-995.48 -2022.28,-1043.67 -1849.99,-1087.92 -1676.73,-1128.23 -1502.59,-1164.57 -1327.67,-1196.92 -1152.05,-1225.26 -975.83,-1249.58 -799.1,-1269.86 -621.96,-1286.1 -444.49,-1298.29 -266.79,-1306.42 -88.94,-1310.49 88.94,-1310.49 266.79,-1306.42 444.49,-1298.29 621.96,-1286.1 799.1,-1269.86 975.83,-1249.58 1152.05,-1225.26 1327.67,-1196.92 1502.59,-1164.57 1676.73,-1128.23 1849.99,-1087.92 2022.28,-1043.67 2193.52,-995.48 2234.29,-976.91 2273.21,-954.71 2309.94,-929.06 2344.2,-900.18 2375.68,-868.3 2404.13,-833.69 2429.32,-796.64 2451.03,-757.45 2469.09,-716.45 2483.34,-673.97 2493.67,-630.38 2500,-586.02 2500,586.02 2497.9,631.43 2491.62,676.45 2481.21,720.7 2466.77,763.8 2448.41,805.39 2426.29,845.1 2400.59,882.6 2371.55,917.57 2339.41,949.72 2304.44,978.75 2266.93,1004.44 2227.22,1026.56 2185.64,1044.92 2142.54,1059.37 1968.03,1106.84 1792.48,1150.27 1615.97,1189.64 1438.59,1224.91 1260.45,1256.09 1081.64,1283.14 902.25,1306.05 722.38,1324.81 542.12,1339.42 361.57,1349.85 180.84,1356.12 0,1358.21 -232.34,1354.76 -1044.77,1387.55 -1509.14,1308.05 -1949.23,1201.71
no net on Mechanical 2 "board outline" (none, remove dead copper): -2142.54,1059.37 -2185.64,1044.92 -2227.22,1026.56 -2266.94,1004.44 -2304.44,978.75 -2339.41,949.72 -2371.55,917.57 -2400.59,882.6 -2426.28,845.1 -2448.4,805.39 -2466.77,763.8 -2481.21,720.7 -2491.62,676.45 -2497.9,631.43 -2500,586.02 -2500,-586.02 -2497.92,-628.14 -2491.69,-669.85 -2481.37,-710.74 -2467.07,-750.41 -2448.93,-788.47 -2427.11,-824.56 -2401.84,-858.32 -2373.36,-889.42 -2341.96,-917.56 -2307.93,-942.46 -2271.6,-963.88 -2233.34,-981.61 -2193.52,-995.48 -2022.28,-1043.67 -1849.99,-1087.92 -1676.73,-1128.23 -1502.59,-1164.57 -1327.67,-1196.92 -1152.05,-1225.26 -975.83,-1249.58 -799.1,-1269.86 -621.96,-1286.1 -444.49,-1298.29 -266.79,-1306.42 -88.94,-1310.49 88.94,-1310.49 266.79,-1306.42 444.49,-1298.29 621.96,-1286.1 799.1,-1269.86 975.83,-1249.58 1152.05,-1225.26 1327.67,-1196.92 1502.59,-1164.57 1676.73,-1128.23 1849.99,-1087.92 2022.28,-1043.67 2193.52,-995.48 2234.29,-976.91 2273.21,-954.71 2309.94,-929.06 2344.2,-900.18 2375.68,-868.3 2404.13,-833.69 2429.32,-796.64 2451.03,-757.45 2469.09,-716.45 2483.34,-673.97 2493.67,-630.38 2500,-586.02 2500,586.02 2497.9,631.43 2491.62,676.45 2481.21,720.7 2466.77,763.8 2448.41,805.39 2426.29,845.1 2400.59,882.6 2371.55,917.57 2339.41,949.72 2304.44,978.75 2266.93,1004.44 2227.22,1026.56 2185.64,1044.92 2142.54,1059.37 1968.03,1106.84 1792.48,1150.27 1615.97,1189.64 1438.59,1224.91 1260.45,1256.09 1081.64,1283.14 902.25,1306.05 722.38,1324.81 542.12,1339.42 361.57,1349.85 180.84,1356.12 0,1358.21 -232.34,1354.76 -1044.77,1387.55 -1509.14,1308.05 -1949.23,1201.71

## Silkscreen, mask and mechanical layers (free items; w line width, h text height)
Top Overlay:
  drawing of 1987 lines, arcs and shapes, not listed
Bottom Overlay:
  drawing of 1978 lines, arcs and shapes, not listed
  text "dOry mainboard v1.0" at 1673.23,-787.4 h60

## Text inside footprints (layer, text, board x,y; h text height)
BT1: Top Overlay "+" at -2188.07,24.69 h45.28 r270
GPS_antenna: Top Overlay "placeholder" at -2392.01,780.32 h47.24 r23; Top Overlay "GPS Antenna" at -2436.62,885.41 h47.24 r23
J2: Mechanical 3 "board edge" at -2001.28,1188.88 h7.87 r193.6